# EAGLE board valve adapter-left-OSH (EAGLE 7.6.0)
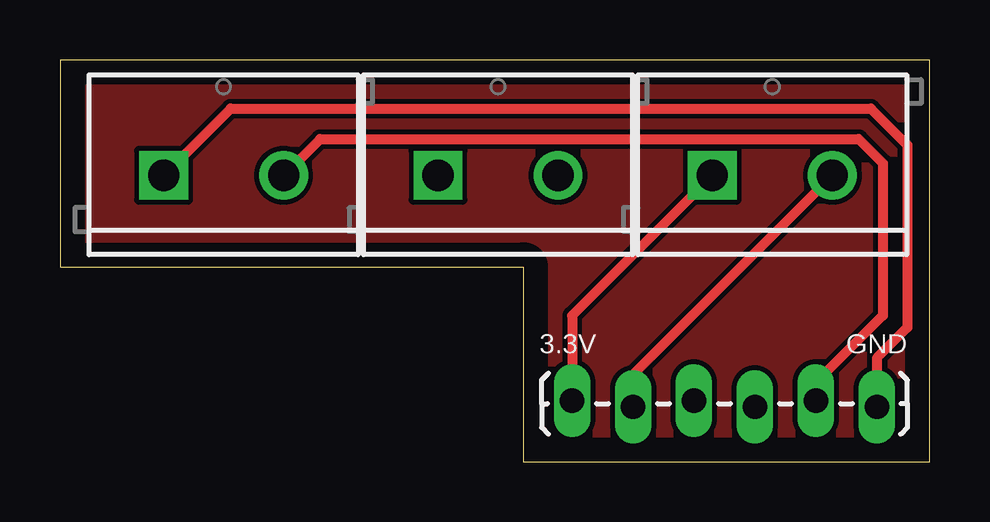
[diagram p0: board, top side]
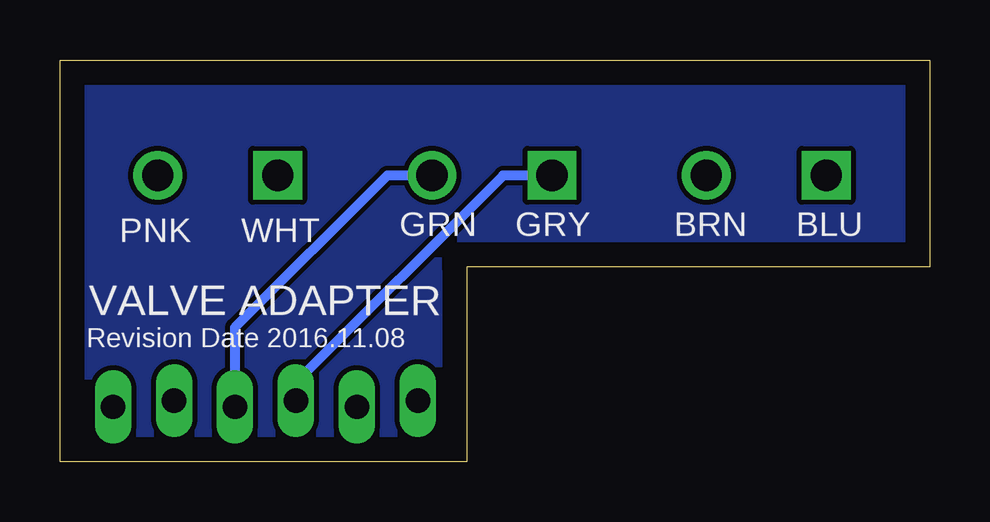
[diagram p1: board, bottom side, seen from below]

Size 36.25 x 16.75 mm. Coordinates in mm from the lower left corner, seen from the top.
Outline: 0,8.13 19.3,8.13 19.3,0 36.25,0 36.25,16.75 0,16.75 0,8.13
Copper layers (1*16): Top 0.035mm / dielectric 1.5mm / Bottom 0.035mm
Design rules "default": minimum track width 10mil, minimum drill 24mil, track to track 8mil, track to pad 8mil, pad to pad 8mil, via to via 8mil, smd to smd 8mil, copper to edge 40mil, drill to drill 8mil, minimum pad ring 10mil, minimum via ring 8mil, stop-mask expansion 4mil, vias tented up to drill 0mil, thermal gap 10mil

## Footprints (pad centres in the part's own frame; a part is rotated, then mirrored left to right if it is on the bottom)
SCREWTERMINAL-5MM-2 = drill 1.3 pad 2.032 square: 1 0,0 | drill 1.3 pad 2.032: 2 5,0
1X06_LOCK_LONGPADS = drill 1.016 long: 1 0,0; 2 2.54,-0.254; 3 5.08,0; 4 7.62,-0.254; 5 10.16,0; 6 12.7,-0.254

## Placement (x,y rotation side)
J1  [SCREWTERMINAL-5MM-2]  4.32,11.94 0 top
J2  [SCREWTERMINAL-5MM-2]  15.75,11.94 0 top
J3  [SCREWTERMINAL-5MM-2]  27.18,11.94 0 top
J8  [1X06_LOCK_LONGPADS]  34.04,2.29 180 top

## Library data of the parts
J1-J3 = SparkFun-Connectors; STOREFRONT_ID: PRT-08432
J8 = SparkFun-Connectors

## Nets
N$1: J1.1 J8.1
N$2: J1.2 J8.2
N$3: J2.2 J8.3
N$4: J2.1 J8.4
N$6: J3.2 J8.5
N$7: J3.1 J8.6

## Tracks (layer width: path | path; a pad name or v marks a point on that pad's centre or on a via)
GND
  pour Bottom: 0,16.76 36.32,16.76 36.32,0 19.3,0 19.3,8.13 0,8.13
  pour Top: 0,16.76 36.32,16.76 36.32,0 19.3,0 19.3,8.13 0,8.13
N$1
  Top 0.406: J1.1 7.11,14.73 33.78,14.73 35.31,13.21 35.31,5.59 34.04,4.32 J8.1
N$2
  Top 0.406: J1.2 10.84,13.46 33.27,13.46 34.29,12.45 34.29,6.1 31.5,3.3 J8.2
N$3
  Bottom 0.406: J2.2 22.61,11.94 28.96,5.59 J8.3
N$4
  Bottom 0.406: J2.1 17.78,11.94 26.42,3.3 J8.4
N$6
  Top 0.406: J3.2 23.88,3.64 J8.5
N$7
  Top 0.406: J3.1 21.34,6.1 J8.6

## Text on the board
bPlace: VALVE ADAPTER
tNames: 3.3V | GND
bNames: BLU | BRN | GRY | GRN | WHT | PNK | Revision Date 2016.11.08